# Altium PCB Kart.PcbDoc (part 2 of 2)
Units mm, origin at the board's own origin, x right, y up, seen from the top; angles counter-clockwise.
Board outline 64 x 85 mm, 4 copper layers (Top Side, Ground Plane, Power Plane, Bottom Side), stack 0.844 mm thick; 85 components, 82 nets, 302 pads, 158 vias.
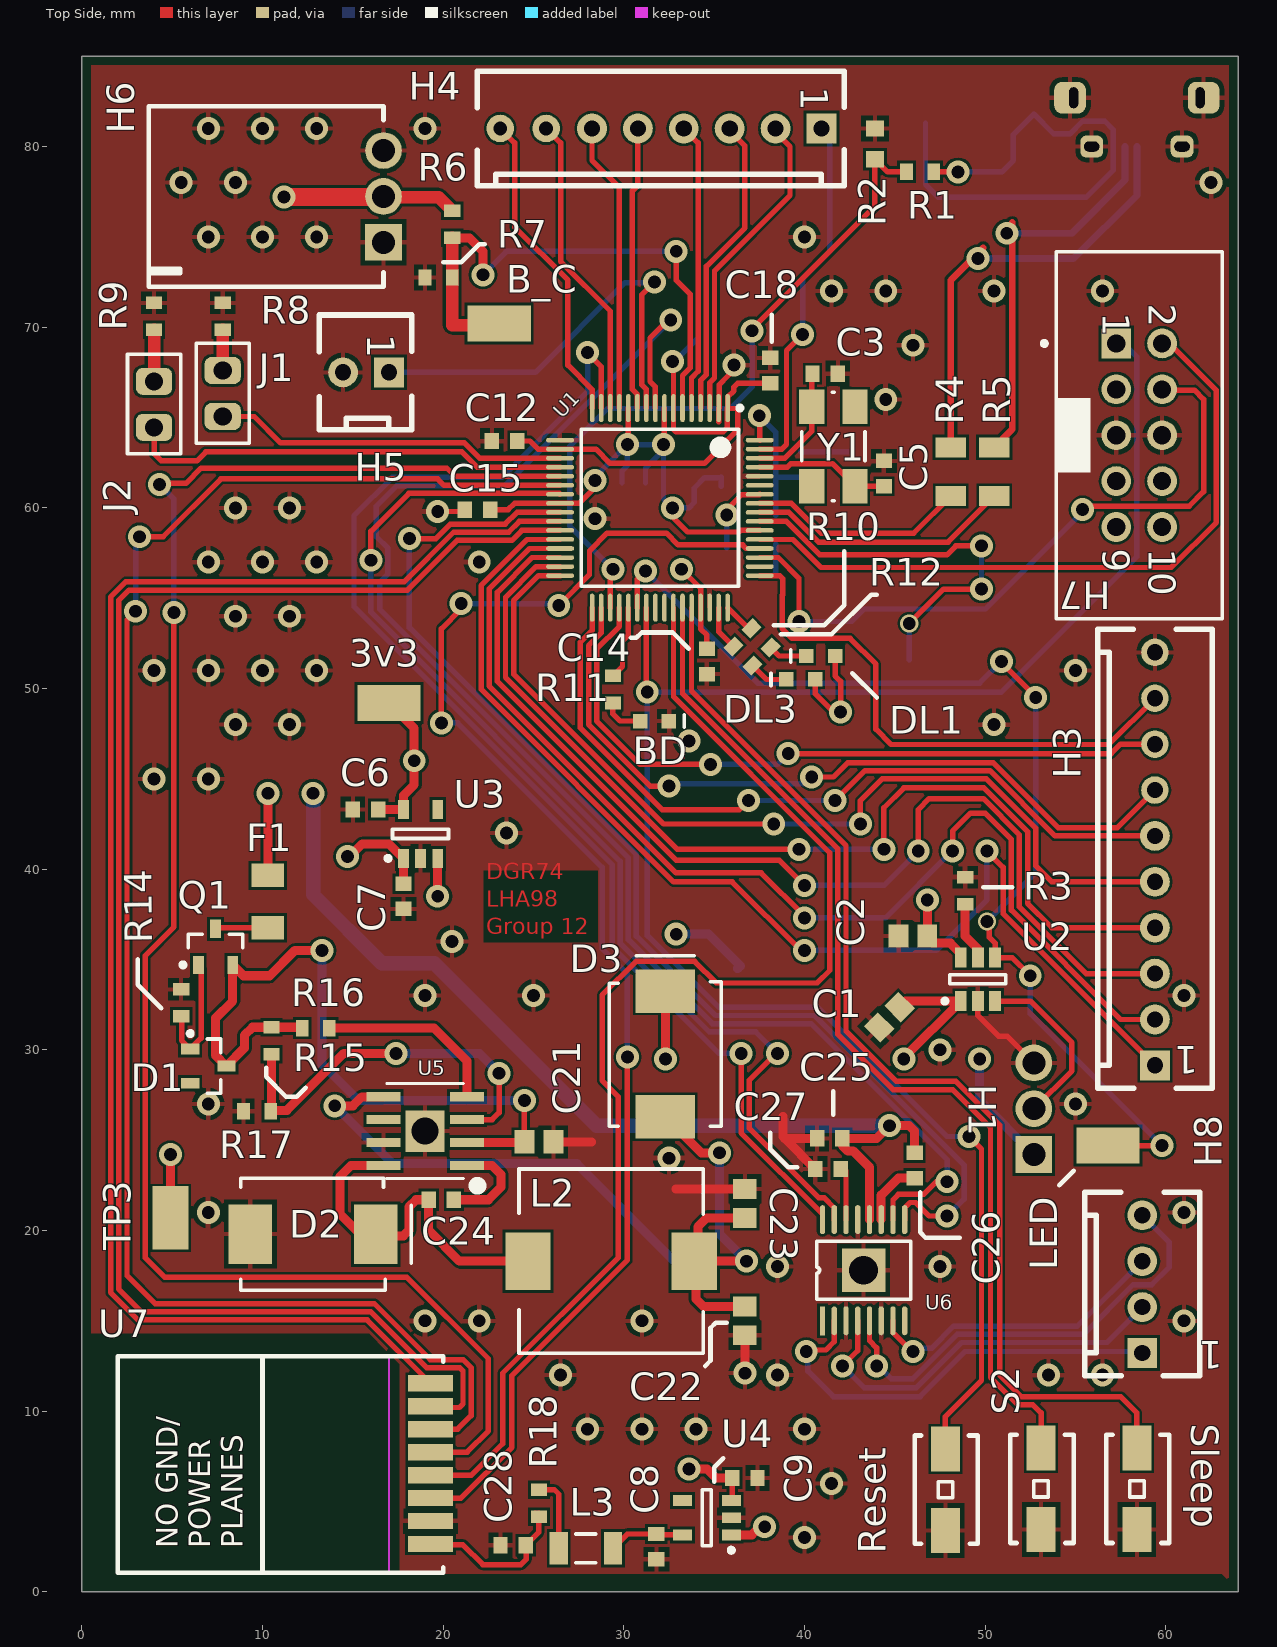
[diagram p0: Top Side view]

## Via types
v1: diameter 1.27, hole 0.711, Top Side to Bottom Side, 154 vias
v2: diameter 1, hole 0.711, Top Side to Bottom Side, 2 vias
v3: diameter 2.2, hole 1.6, Top Side to Bottom Side, 1 vias
v4: diameter 2, hole 1.5, Top Side to Bottom Side, 1 vias

## Nets (pads, with @x,y where several pads share a name; then routed paths per layer and width w, separated by ;. In a path a pad name is that pad's centre, name@x,y a point inside that pad or via, vN(x,y) a via of type N, cw(c..) or ccw(c..) an arc to the next point about the centre after c; other vN are vias at no path point) (continued)
VBUS: (continued)
  Bottom Side w0.3: VBUS.1 46.7,77.9 47.4,77.2 55.6,77.2 57.1,78.7 H2.1 57.1,80.925 56.625,81.4 55.4,81.4 54.7,80.7 53.8,80.7 C4.1 51.566,80.666 51.566,79.234 50.931,78.6 v1(48.5,78.6)
pads on no net: D1.2 H2.4 H7.3 H7.9 H7.10 U1.40 U1.41 U1.50 U1.59 U3.4 U4.4 U5.6 U6.1 U6.8 Y1.2 Y1.4

## Polygon pours and split planes (outlines as drawn)
GND on Top Side "GND_L01_P000" (solid, remove dead copper, pour order 0): 0.1,85.1 0.5,84.7 63.6,84.7 63.6,0.5 63.1,1 0.1,1
GND on Bottom Side "GND_L04_P002" (solid, remove dead copper, pour order 2): 0.6,84.8 63.5,84.8 63.6,84.7 63.5,84.6 63.5,0.4 0.1,0.4 0,0.5
GND on Ground Plane (split plane): 63.49,0.51 17.6,0.51 17.6,12.6 15.9,14.3 0.51,14.3 0.51,84.49 63.49,84.49
5V on Power Plane (split plane): 42.371,40.546 42.371,34 42.38,33.95 42.408,33.908 45.108,31.208 45.15,31.18 45.2,31.171 63.49,31.171 63.49,26.793 63.45,26.82 63.4,26.829 42.9,26.829 42.85,26.82 42.808,26.792 38.908,22.892 38.88,22.85 38.871,22.8 38.871,10.6 38.88,10.55 38.908,10.508 41.108,8.308 41.15,8.28 41.2,8.271 63.49,8.271 63.49,0.51 17.6,0.51 17.6,12.6 15.9,14.3 0.51,14.3 0.51,42.771 13.5,42.771 13.55,42.78 13.592,42.808 14.492,43.708 14.52,43.75 14.529,43.8 14.529,44.771 38.146,44.771
V_BATT on Power Plane (split plane): 21.371,75.954 14.308,68.892 14.28,68.85 14.271,68.8 14.271,43.854 13.446,43.029 0.51,43.029 0.51,84.49 21.371,84.49
V_BATT on Power Plane (split plane): 63.49,8.529 41.254,8.529 39.129,10.654 39.129,22.746 42.954,26.571 63.4,26.571 63.45,26.58 63.49,26.607
3V3 on Power Plane (split plane): 63.49,31.429 45.254,31.429 42.629,34.054 42.629,40.6 42.62,40.65 42.592,40.692 38.292,44.992 38.25,45.02 38.2,45.029 14.529,45.029 14.529,68.746 21.592,75.808 21.62,75.85 21.629,75.9 21.629,84.49 63.49,84.49

## Other copper
Top Side:
  pour cut-out: 0,14.3 15.9,14.3 17.6,12.6 17.6,0.5 0,0.5
  region: 1.5,15
  text "DGR74  / LHA98  / Group 12" at 22.4,36.1 h1.52
Bottom Side:
  pour cut-out: 0,14.3 15.9,14.3 17.6,12.6 17.6,0.5 0,0.5
Ground Plane (plane layer: these items are gaps in the copper):
  pour cut-out: 0,14.3 15.9,14.3 17.6,12.6 17.6,0.5 0.1,0.5 0,0.6
Power Plane (plane layer: these items are gaps in the copper):
  pour cut-out: 0.3,14.3 15.9,14.3 17.6,12.6 17.6,0.5 0.5,0.5 0.2,0.8
  pour cut-out: 16.7,13.8
  pour cut-out: 12.8,11.8
  lines w0.254: -0.2,42.9 13.5,42.9 14.4,43.8 14.4,68.8 21.5,75.9 21.5,84.7 21.2,85 0.5,85 0.4,84.9 ; 14.4,44.9 38.2,44.9 42.5,40.6 42.5,34 45.2,31.3 63.8,31.3 ; 63.4,26.7 42.9,26.7 39,22.8 39,10.6 41.2,8.4 63.7,8.4

## Silkscreen, mask and mechanical layers (free items; w line width, h text height)
Top Overlay:
  lines w0.254: 3.1,35 3.1,33.6 4.4,32.3 ; 10.2,29 10.2,28.5 11.3,27.4 11.9,27.4 12.4,27.9 ; 20,73.6 21,73.6 22,74.6 22.3,74.6 ; 30.4,52.8 30.7,52.8 31,53.1 32.7,53.1 33.6,52.2 ; 34.5,12.5 34.8,12.8 34.8,12.9 34.8,13 34.8,14.6 35.1,14.9 35.7,14.9 ; 35,6.1 35,6.9 35.5,7.4 ; 38.1,25.4 38.1,24.5 39.1,23.5 39.6,23.5 ; 38.2,69.2 38.2,70.7 ; 38.3,53.5 41.1,53.5 42.2,54.6 42.2,57.6 ; 38.7,53 41.5,53 43.7,55.2 44,55.2 ; 41.6,26.4 41.6,27.7 ; 42.65,50.85 44,49.5 ; 46.4,22.1 46.4,19.9 46.7,19.6 48.6,19.6 ; 49.9,39 51.5,39 ; 54.1,22.5 54.9,23.3
Bottom Overlay:
  lines w0.254: 28,62.8 28.8,62.8 29.4,62.2 ; 28.3,57.4 29.2,57.4 31,59.2 ; 33.8,63.3 33.8,64.3 ; 36.7,63.9 36.9,63.7 36.9,63
Board Outline:
  the board outline again, w0.254

## Dimensions
0,86 to 64,86 on Mechanical 1
65,85 to 65,0 on Mechanical 1

## Text inside footprints (layer, text, board x,y; h text height)
H2: Mechanical 1 "PCB Edge" at 56.25,84.97 h0.52 r180
H3: Top Overlay "1" at 61.8,30.2 h1.52 r180
H4: Top Overlay "1" at 39.8,83.3 h1.52 r270
H5: Top Overlay "1" at 15.8,69.6 h1.52 r270
H7: Top Overlay "2" at 59.05,71.3 h1.5 r270; Top Overlay "1" at 56.51,70.8 h1.5 r270; Top Overlay "10" at 59.05,57.74 h1.5 r270; Top Overlay "9" at 56.51,57.74 h1.5 r270
H8: Top Overlay "1" at 63.145,13.855 h1.52 r180
U5: Mechanical 13 "*" at 20.93,24.344 h1.27 r180
U7: Top Overlay "NO GND/ / POWER / PLANES" at 8.9,2.4 h1.2 r90